# Altium PCB STM32.PcbDoc (part 9 of 10)
Units mil, origin at the board's own origin, x right, y up, seen from the top; angles counter-clockwise.
Board outline 3925 x 3925 mil, 2 copper layers (Top Layer, Bottom Layer); 152 components, 142 nets, 670 pads, 189 vias.
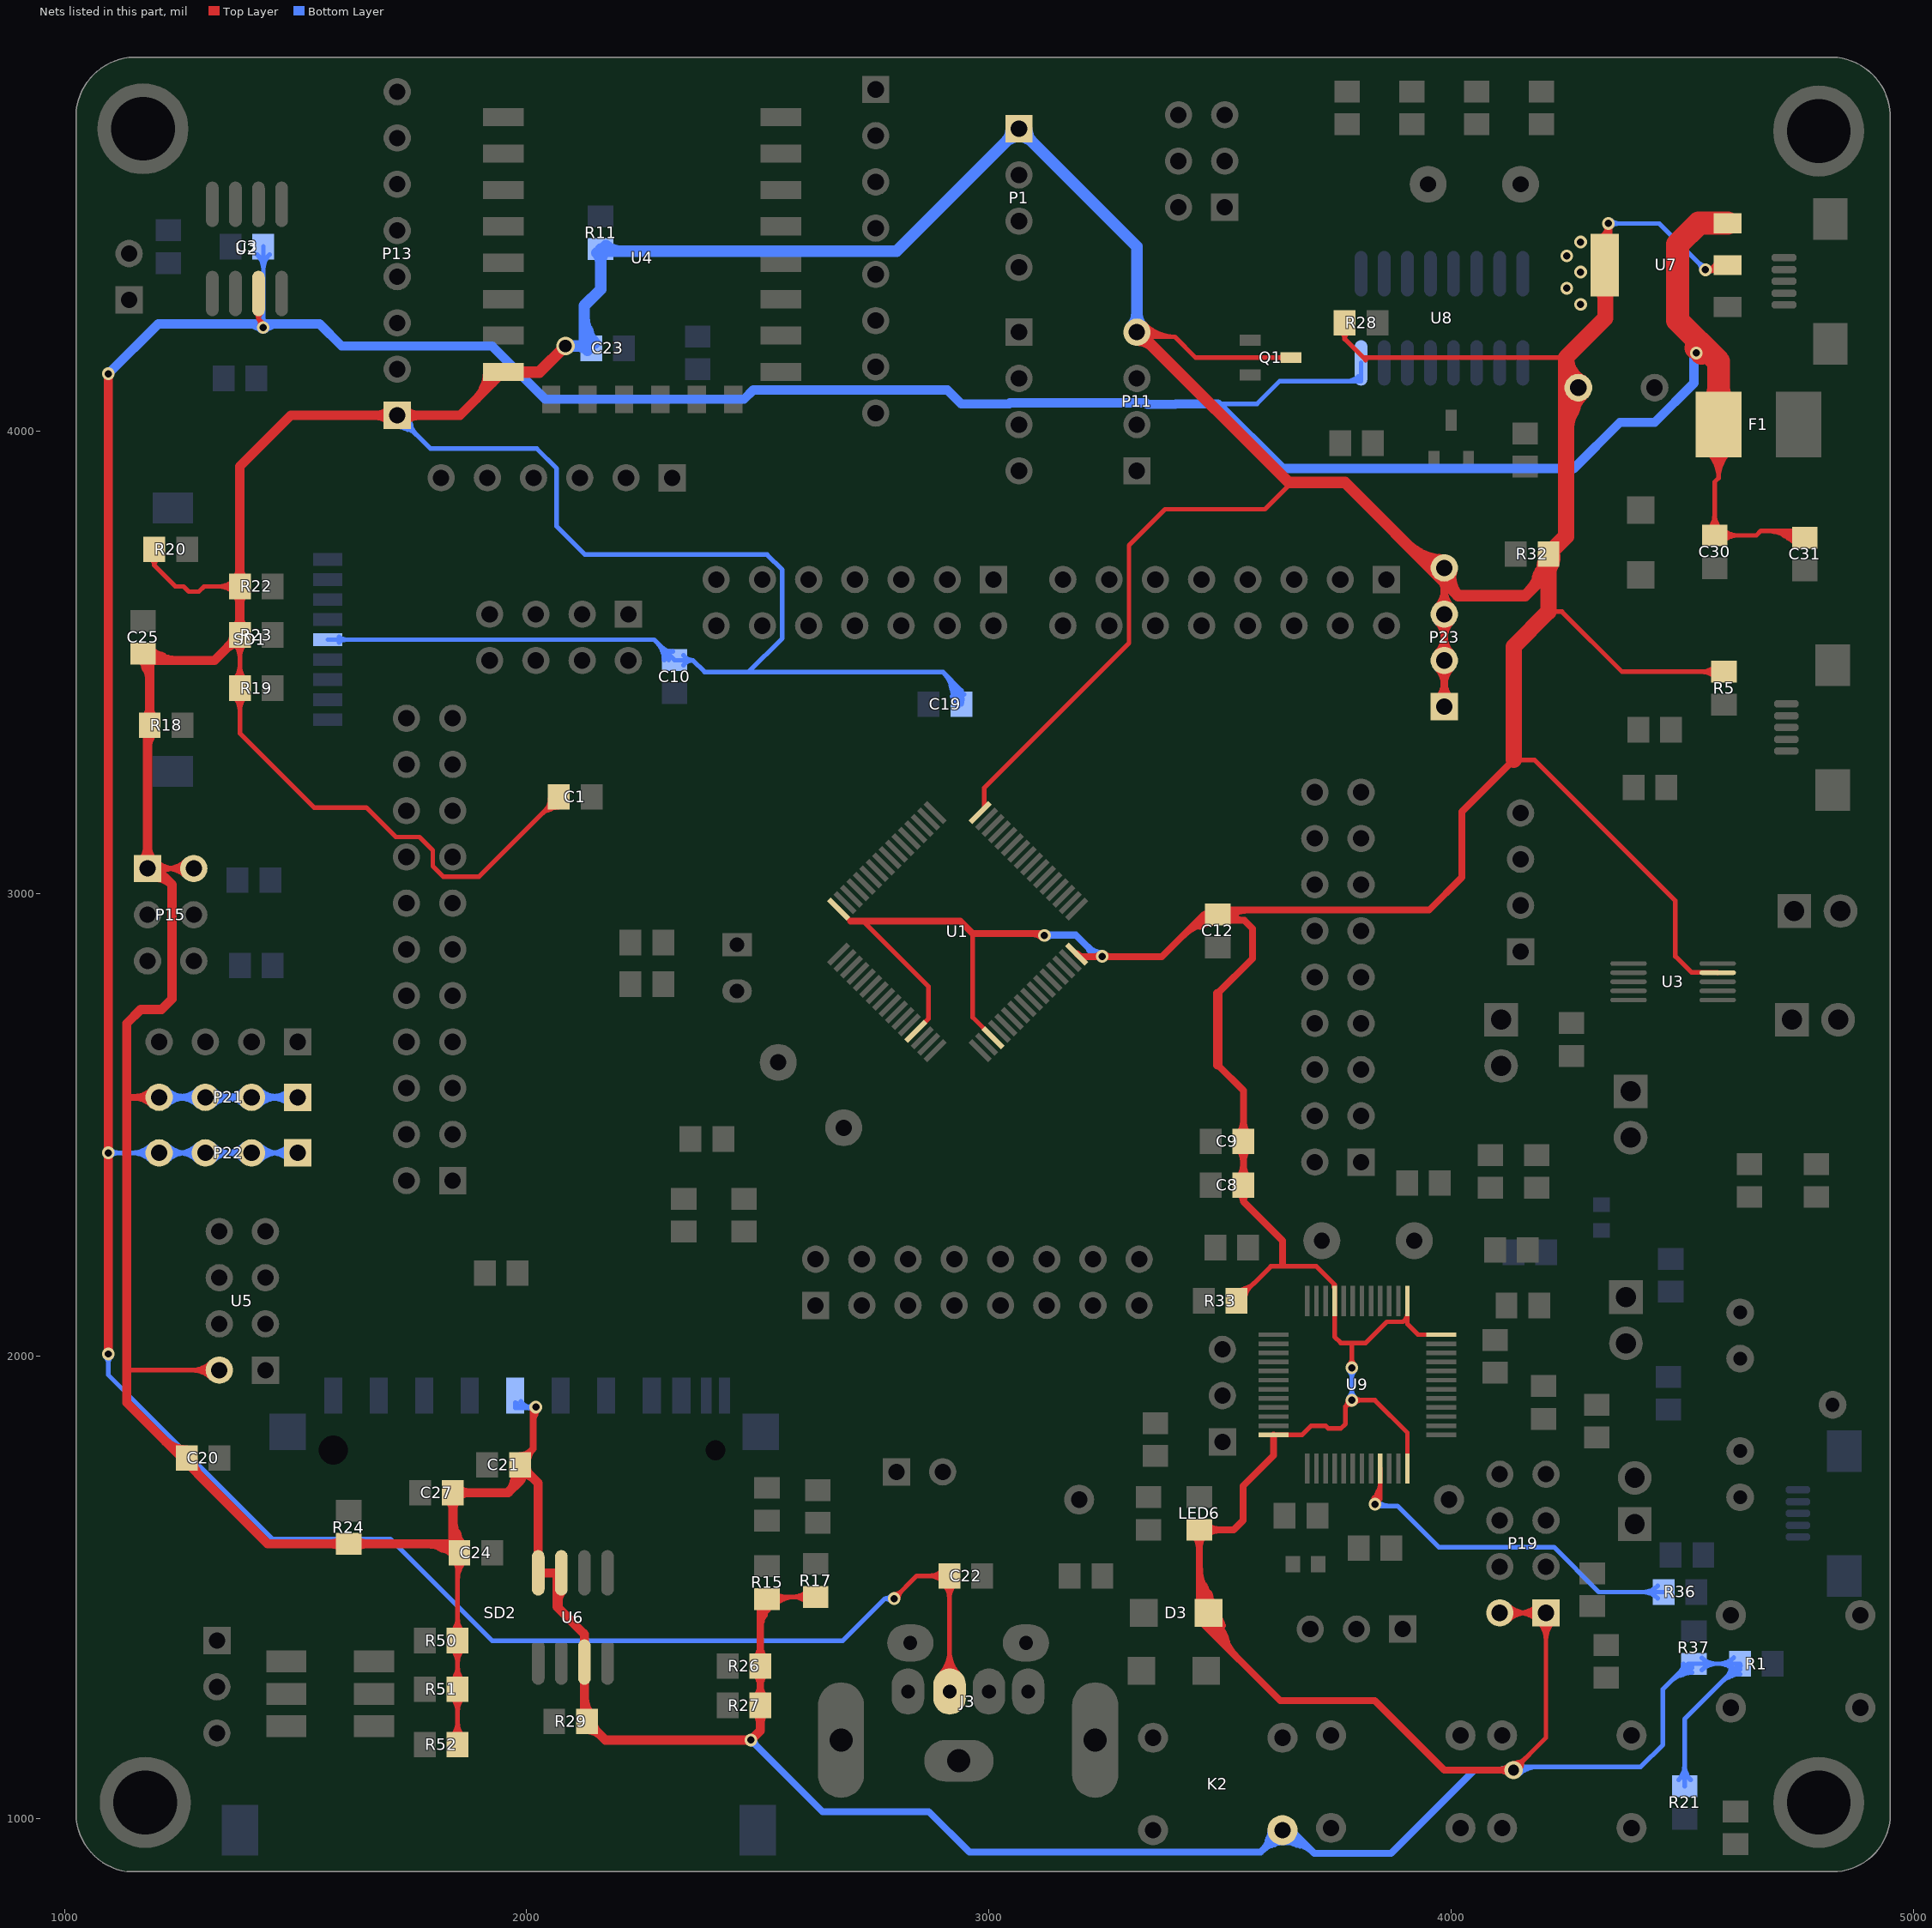
[diagram p9: the nets of this part, all layers, seen from the top]

## Via types
v1: diameter 27.56, hole 15.75, Top Layer to Bottom Layer, tented both sides, 185 vias
v2: diameter 39.37, hole 23.62, Top Layer to Bottom Layer, tented both sides, 3 vias
v3: diameter 39.37, hole 27.56, Top Layer to Bottom Layer, tented both sides, 1 vias

## Nets (pads, with @x,y where several pads share a name; then routed paths per layer and width w, separated by ;. In a path a pad name is that pad's centre, name@x,y a point inside that pad or via, vN(x,y) a via of type N, cw(c..) or ccw(c..) an arc to the next point about the centre after c; other vN are vias at no path point) (continued)
USB_DP: R36.2 U9.33 | length 1227.2
  Top Layer w10: 3833.59,1694.51 ccw(c3846.18,1687.24) v1@3833.98,1679.34 ; v1@3834.4,1688.76 ccw(c3833.46,1702.48) 3845.37,1695.6 ; v1(3835,1680) 3846.24,1691.24 ; 3841.76,1708.67 ccw(c3861.59,1697.22) v1@3842.37,1684.77 ; v1@3843.48,1682.27 cw(c3860.07,1686.72) 3845.2,1695.3 ; U9.33@3846.24,1757.37 3846.24,1691.24 ; 3846.24,1691.24 ccw(c3853.3,1684.17) 3843.56,1681.95 cw(c3853.3,1684.17) 3846.24,1691.24 ; 3846.24,1691.24 cw(c3839.17,1698.3) 3836.95,1688.56 ccw(c3839.17,1698.3) 3846.24,1691.24 ; v1@3828.79,1686.21 ccw(c3786.68,1728.32) 3846.24,1728.32 cw(c3786.68,1728.32) v1@3828.79,1686.21 ; v1@3835.86,1679.14 ccw(c3810.82,1704.18) 3846.24,1704.18 cw(c3810.82,1704.18) v1@3835.86,1679.14
  Bottom Layer w10: v1@3843.74,1676.26 3883.74,1676.26 3972.99,1587.01 4222.4,1587.01 4319.41,1490 R36.2@4459.57,1490 ; 4414.61,1490 ccw(c4414.61,1534.96) 4446.4,1503.17 cw(c4414.61,1534.96) 4414.61,1490 ; 4414.61,1490 cw(c4414.61,1445.04) 4446.4,1476.83 ccw(c4414.61,1445.04) 4414.61,1490 ; v1@3841.21,1686.21 ccw(c3865.22,1710.22) 3865.22,1676.26 cw(c3865.22,1710.22) v1@3841.21,1686.21
VCC: C1.1 C8.2 C9.2 C10.1 C12.1 C19.1 C20.2 C21.1 C23.1 C24.1 C25.1 C27.1 D3.1 K2.1 LED6.1 P1.1 P11.4 P13.1 P15.1 P15.2 P19.1 P19.2 P21.1 P21.2 P21.3 P21.4 P23.1 P23.2 P23.3 P23.4 pad.0@4275,4095 Q1.3 R1.1 R5.1 R11.1 R15.1 R17.1 R18.1 R19.1 R20.1 R21.1 R22.1 R23.1 R24.1 R26.1 R27.1 R28.2 R29.1 R32.1 R33.2 R37.2 R50.1 R51.1 R52.1 SD1.4 SD2.4 U1.13 U1.19 U1.32 U1.48 U1.64 U3.9 U4.15 U5.2 U6.3 U6.7 U6.8 U7.2 U7.4 U9.1 U9.9 U9.24 U9.36 U9.48 | length 49081.6
  Top Layer w10: 1135,1965 1140,1970 U5.2@1335,1970 ; R20.1@1194.57,3745 1194.57,3710.43 ; P15.1@1197.99,3055 P15.2@1280,3055 ; R23.1@1379.57,3560 R19.1@1379.57,3445 1379.57,3347.43 1540,3187 1653,3187 1717,3123 1768,3123 1797,3094 1797,3060 1820,3037 1896.57,3037 C1.1@2069.57,3210 ; R22.1@1379.57,3665 1302.14,3665 1290.88,3653.74 1269.12,3653.74 1257.86,3665 1240,3665 1194.57,3710.43 ; R52.1@1850.43,1160 R51.1@1850.43,1280 R50.1@1850.43,1385 C24.1@1850.43,1570.87 ; 2046.1,3181.15 ccw(c2037,3215.15) C1.1@2070.9,3205.69 ; R15.1@2524.57,1479.57 R17.1@2625,1479.57 ; U1.64@2675,2967.44 2700.92,2941.52 ; 2728.08,2940.92 2869,2800 2869,2729.93 U1.13@2842.03,2702.97 ; 2964.74,2914 2964.74,2733.15 3008.84,2689.05 U1.19@3009.07,2689.05 ; U1.48@2981.23,3176.23 2989.74,3184.74 2989.74,3229.27 3303,3542.53 3303,3754 3381,3832 3597,3832 3647.5,3882.5 ; P11.4@3320,4205 3333.33,4205 3402,4205 ; C12.1@3495,2955.43 C12.1@3507.72,2942.72 ; R33.2@3534.11,2124.31 cw(c3568.01,2114.85) 3558.9,2148.85 ; R33.2@3535.43,2120 3610,2194.57 3708.28,2194.57 3745.61,2157.24 3745.61,2155 ; U9.24@3615.92,1829.91 U9.24@3615.92,1830.21 3677.69,1830.21 3697.18,1849.7 3728.16,1849.7 3734.12,1843.74 3760.88,1843.74 3771.26,1854.12 3771.26,1891.26 ; Q1.3@3653.58,4160 3447,4160 3402,4205 ; 3747.81,2155 U9.9@3747.81,2119.58 3747.81,2042.19 3761.26,2028.74 3785,2028.74 ; R28.2@3769.57,4235 3769.57,4200 ; v1(3785,1975) 3785,2028.74 ; U9.36@3905.29,1757.37 3905.29,1834.71 3835,1905 v1(3785,1905) 3771.26,1891.26 ; U9.1@3905.29,2119.58 3905.29,2084.11 ; U9.48@3978.13,2046.74 3928.26,2046.74 3905.29,2069.71 3905.29,2084.11 ; P23.4@3985,3705 3985,3675 ; P19.2@4105,1445 P19.1@4205,1445 4205,1175 v2(4135,1105) ; 4125,3290 4180,3290 4485,2985 4485,2865 4520,2830 4576.14,2830 U3.9@4576.46,2829.68 ; v2@4129.79,1106.07 cw(c4150.72,1101.78) 4145.19,1122.42 ; v2@4136.07,1099.79 ccw(c4131.78,1120.72) 4152.42,1115.19 ; 4210.43,3610.43 4239.57,3610.43 4369.24,3480.76 R5.1@4589.67,3480.76 ; 4248.39,4160 3815,4160 3815,4154.57 3769.57,4200 ; U7.4@4329.95,4422.82 ccw(c4328.69,4437.56) v1@4343.49,4437.56 ; U7.4@4330.8,4412.86 ccw(c4329.62,4426.67) U7.4@4343.49,4426.67 ; U7.4@4340,4367.87 v1(4340,4450) ; 4343.49,4431.56 ccw(c4366.29,4431.56) U7.4@4350.17,4415.44 ; v1@4556.41,4356 ccw(c4575.15,4373.53) U7.2@4575.15,4347.87 ; v1@4563.26,4347.87 cw(c4569.2,4325.68) U7.2@4580.69,4345.58 ; 4566.06,4347.87 ccw(c4566.06,4333.94) v1@4556.21,4343.79 ; U7.2@4569.74,4349.61 ccw(c4564.93,4367.57) U7.2@4582.67,4361.99 ; U7.2@4587.87,4350 v1(4550,4350) ; 1194.57,3710.43 ccw(c1178.69,3710.43) 1186,3724.53 cw(c1178.69,3710.43) 1194.57,3710.43 ; 1194.57,3710.43 cw(c1210.45,3710.43) 1203.14,3724.53 ccw(c1210.45,3710.43) 1194.57,3710.43 ; 1215.07,3055 ccw(c1215.07,3019.93) 1190.27,3044.73 cw(c1215.07,3019.93) 1215.07,3055 ; 1215.07,3055 cw(c1215.07,3090.07) 1190.27,3065.27 ccw(c1215.07,3090.07) 1215.07,3055 ; 1220.79,3055 ccw(c1220.79,3114.21) 1262.66,3072.34 cw(c1220.79,3114.21) 1220.79,3055 ; 1220.79,3055 cw(c1220.79,2995.78) 1262.66,3037.65 ccw(c1220.79,2995.78) 1220.79,3055 ; 1239.21,3055 ccw(c1239.21,2995.78) 1197.34,3037.65 cw(c1239.21,2995.78) 1239.21,3055 ; 1239.21,3055 cw(c1239.21,3114.21) 1197.34,3072.34 ccw(c1239.21,3114.21) 1239.21,3055 ; 1244.93,3055 ccw(c1244.93,3090.07) 1269.73,3065.27 cw(c1244.93,3090.07) 1244.93,3055 ; 1244.93,3055 cw(c1244.93,3019.93) 1269.73,3044.73 ccw(c1244.93,3019.93) 1244.93,3055 ; 1275.79,1970 ccw(c1275.79,2029.21) 1317.66,1987.34 cw(c1275.79,2029.21) 1275.79,1970 ; 1275.79,1970 cw(c1275.79,1910.79) 1317.66,1952.66 ccw(c1275.79,1910.79) 1275.79,1970 ; 1299.93,1970 ccw(c1299.93,2005.07) 1324.73,1980.27 cw(c1299.93,2005.07) 1299.93,1970 ; 1299.93,1970 cw(c1299.93,1934.93) 1324.73,1959.73 ccw(c1299.93,1934.93) 1299.93,1970 ; 1334.61,3665 ccw(c1334.61,3709.96) 1366.4,3678.17 cw(c1334.61,3709.96) 1334.61,3665 ; 1334.61,3665 cw(c1334.61,3620.04) 1366.4,3651.83 ccw(c1334.61,3620.04) 1334.61,3665 ; 1379.57,3396.11 ccw(c1334.61,3396.11) 1366.4,3427.9 cw(c1334.61,3396.11) 1379.57,3396.11 ; 1379.57,3396.11 cw(c1424.53,3396.11) 1392.74,3427.9 ccw(c1424.53,3396.11) 1379.57,3396.11 ; 1379.57,3493.89 ccw(c1424.53,3493.89) 1392.74,3462.1 cw(c1424.53,3493.89) 1379.57,3493.89 ; 1379.57,3493.89 cw(c1334.61,3493.89) 1366.4,3462.1 ccw(c1334.61,3493.89) 1379.57,3493.89 ; 1379.57,3511.11 ccw(c1334.61,3511.11) 1366.4,3542.9 cw(c1334.61,3511.11) 1379.57,3511.11 ; 1379.57,3511.11 cw(c1424.53,3511.11) 1392.74,3542.9 ccw(c1424.53,3511.11) 1379.57,3511.11 ; 1850.43,1208.89 ccw(c1895.39,1208.89) 1863.6,1177.1 cw(c1895.39,1208.89) 1850.43,1208.89 ; 1850.43,1208.89 cw(c1805.48,1208.89) 1837.27,1177.1 ccw(c1805.48,1208.89) 1850.43,1208.89 ; 1850.43,1231.11 ccw(c1805.48,1231.11) 1837.27,1262.9 cw(c1805.48,1231.11) 1850.43,1231.11 ; 1850.43,1231.11 cw(c1895.39,1231.11) 1863.6,1262.9 ccw(c1895.39,1231.11) 1850.43,1231.11 ; 1850.43,1328.89 ccw(c1895.39,1328.89) 1863.6,1297.1 cw(c1895.39,1328.89) 1850.43,1328.89 ; 1850.43,1328.89 cw(c1805.48,1328.89) 1837.27,1297.1 ccw(c1805.48,1328.89) 1850.43,1328.89 ; 1850.43,1336.11 ccw(c1805.48,1336.11) 1837.27,1367.9 cw(c1805.48,1336.11) 1850.43,1336.11 ; 1850.43,1336.11 cw(c1895.39,1336.11) 1863.6,1367.9 ccw(c1895.39,1336.11) 1850.43,1336.11 ; 1850.43,1433.89 ccw(c1895.39,1433.89) 1863.6,1402.1 cw(c1895.39,1433.89) 1850.43,1433.89 ; 1850.43,1433.89 cw(c1805.48,1433.89) 1837.27,1402.1 ccw(c1805.48,1433.89) 1850.43,1433.89 ; 2576.11,1479.57 ccw(c2576.11,1524.53) 2607.9,1492.74 cw(c2576.11,1524.53) 2576.11,1479.57 ; 2576.11,1479.57 cw(c2576.11,1434.61) 2607.9,1466.4 ccw(c2576.11,1434.61) 2576.11,1479.57 ; 3402,4205 cw(c3402,4295.1) 3337.55,4232.14 ccw(c3402,4295.1) 3402,4205 ; 3626.31,4160 ccw(c3626.31,4176.44) 3637.94,4164.82 cw(c3626.31,4176.44) 3626.31,4160 ; 3626.31,4160 cw(c3626.31,4143.56) 3637.94,4155.18 ccw(c3626.31,4143.56) 3626.31,4160 ; 3745.61,2152.4 ccw(c3753.14,2152.4) U9.9@3747.81,2147.08 ; 3745.61,2152.4 ccw(c3753.14,2152.4) U9.9@3747.81,2147.08 ; 3745.61,2152.4 ccw(c3753.14,2152.4) U9.9@3747.81,2147.08 ; 3745.61,2152.4 ccw(c3753.14,2152.4) U9.9@3747.81,2147.08 ; 3769.57,4200 ccw(c3752.97,4200) 3760.79,4214.64 cw(c3752.97,4200) 3769.57,4200 ; 3769.57,4200 cw(c3786.16,4200) 3778.34,4214.64 ccw(c3786.16,4200) 3769.57,4200 ; 3771.26,1891.26 ccw(c3759.16,1903.36) 3776.24,1904.44 cw(c3759.16,1903.36) 3771.26,1891.26 ; 3771.26,1891.26 cw(c3783.36,1879.16) 3784.44,1896.24 ccw(c3783.36,1879.16) 3771.26,1891.26 ; 3785,1996.2 ccw(c3806.2,1996.2) 3791.21,1981.21 cw(c3806.2,1996.2) 3785,1996.2 ; 3785,1996.2 cw(c3763.8,1996.2) 3778.79,1981.21 ccw(c3763.8,1996.2) 3785,1996.2 ; 3785,2028.74 3815,2028.74 3860.85,2074.6 3895.78,2074.6 3905.29,2084.11 ; 3806.2,1905 ccw(c3806.2,1883.8) 3791.21,1898.79 cw(c3806.2,1883.8) 3806.2,1905 ; 3806.2,1905 cw(c3806.2,1926.2) 3791.21,1911.21 ccw(c3806.2,1926.2) 3806.2,1905 ; 3985,3675 ccw(c3978.92,3675) 3980.13,3680.96 cw(c3978.92,3675) 3985,3675 ; 3985,3675 cw(c3991.08,3675) 3989.87,3680.96 ccw(c3991.08,3675) 3985,3675 ; 4140.07,1445 ccw(c4140.07,1409.93) 4115.27,1434.73 cw(c4140.07,1409.93) 4140.07,1445 ; 4140.07,1445 cw(c4140.07,1480.07) 4115.27,1455.27 ccw(c4140.07,1480.07) 4140.07,1445 ; 4145.79,1445 ccw(c4145.79,1504.21) 4187.66,1462.34 cw(c4145.79,1504.21) 4145.79,1445 ; 4145.79,1445 cw(c4145.79,1385.79) P19.1@4187.66,1427.66 ; 4145.79,1445 cw(c4145.79,1385.79) P19.1@4187.66,1427.66 ; 4160.07,1130.07 ccw(c4185.14,1105) 4149.69,1105 cw(c4185.14,1105) 4160.07,1130.07 ; 4160.07,1130.07 cw(c4135,1155.14) 4135,1119.68 ccw(c4135,1155.14) 4160.07,1130.07 ; 4164.21,1445 ccw(c4164.21,1385.79) 4122.34,1427.66 cw(c4164.21,1385.79) 4164.21,1445 ; 4164.21,1445 cw(c4164.21,1504.21) 4122.34,1462.34 ccw(c4164.21,1504.21) 4164.21,1445 ; 4169.93,1445 ccw(c4169.93,1480.07) 4194.73,1455.27 cw(c4169.93,1480.07) 4169.93,1445 ; 4169.93,1445 cw(c4169.93,1409.93) P19.1@4194.73,1434.73 ; 4169.93,1445 cw(c4169.93,1409.93) P19.1@4194.73,1434.73 ; P19.1@4187.66,1427.66 cw(c4145.79,1385.79) 4205,1385.79 ; P19.1@4187.66,1427.66 cw(c4145.79,1385.79) 4205,1385.79 ; P19.1@4194.73,1434.73 cw(c4169.93,1409.93) 4205,1409.93 ; P19.1@4194.73,1434.73 cw(c4169.93,1409.93) 4205,1409.93 ; 4205,1385.79 cw(c4264.21,1385.79) 4222.34,1427.66 ccw(c4264.21,1385.79) 4205,1385.79 ; 4205,1409.93 cw(c4240.07,1409.93) 4215.27,1434.73 ccw(c4240.07,1409.93) 4205,1409.93 ; v1@4333.27,4444.36 cw(c4324.19,4436.76) 4335.63,4433.69 ; v1@4333.27,4444.36 cw(c4324.19,4436.76) 4335.63,4433.69 ; v1@4333.27,4444.36 cw(c4324.19,4436.76) 4335.63,4433.69 ; v1@4335.61,4442.4 cw(c4329.44,4431.71) 4341.36,4434.9 ; v1@4335.61,4442.4 cw(c4329.44,4431.71) 4341.36,4434.9 ; v1@4335.61,4442.4 cw(c4329.44,4431.71) 4341.36,4434.9 ; 4335.63,4433.69 cw(c4347.07,4430.63) v1@4343.01,4441.75 ; 4335.63,4433.69 cw(c4347.07,4430.63) v1@4343.01,4441.75 ; 4335.63,4433.69 cw(c4347.07,4430.63) v1@4343.01,4441.75 ; 4340,4428.8 ccw(c4318.8,4428.8) 4333.79,4443.79 cw(c4318.8,4428.8) 4340,4428.8 ; 4340,4428.8 cw(c4361.2,4428.8) 4346.21,4443.79 ccw(c4361.2,4428.8) 4340,4428.8 ; v1(4340,4450) cw(c4307.39,4450) 4321.27,4420.49 ccw(c4307.39,4450) v1(4340,4450) ; U7.4@4343.49,4426.97 cw(c4363.26,4432.27) v1@4346.98,4444.68 ; U7.4@4343.49,4426.97 cw(c4363.26,4432.27) v1@4346.98,4444.68 ; U7.4@4343.49,4426.97 cw(c4363.26,4432.27) v1@4346.98,4444.68 ; U7.4@4350.17,4415.44 cw(c4374.71,4439.98) 4340,4439.98 ccw(c4374.71,4439.98) U7.4@4350.17,4415.44 ; v1(4550,4350) ccw(c4550,4375.23) 4573.5,4366.05 cw(c4550,4375.23) v1(4550,4350) ; v1@4556.21,4343.79 cw(c4571.2,4328.8) U7.2@4571.2,4350 ; v1@4556.21,4343.79 cw(c4571.2,4328.8) U7.2@4571.2,4350 ; U7.2@4571.2,4350 cw(c4571.2,4371.2) 4556.21,4356.21 ccw(c4571.2,4371.2) U7.2@4571.2,4350 ; C24.1@1841.4,1557.9 cw(c1819.59,1536.09) 1850.43,1536.09 ccw(c1819.59,1536.09) C24.1@1841.4,1557.9 ; 1850.43,1516.13 cw(c1909.51,1516.13) 1867.74,1557.9 ccw(c1909.51,1516.13) 1850.43,1516.13 ; 1850.43,1540.27 cw(c1885.36,1540.27) 1860.66,1564.97 ccw(c1885.36,1540.27) 1850.43,1540.27 ; 2031.06,3171.49 cw(c2069.57,3132.98) 2069.57,3187.44 ccw(c2069.57,3132.98) 2031.06,3171.49 ; 2040.56,3180.99 ccw(c2015.49,3206.06) 2050.95,3206.06 cw(c2015.49,3206.06) 2040.56,3180.99 ; C1.1@2048.13,3188.56 cw(c2069.57,3167.12) 2069.57,3197.44 ccw(c2069.57,3167.12) C1.1@2048.13,3188.56 ; R15.1@2530.03,1468.9 cw(c2555.78,1443.16) 2555.78,1479.57 ccw(c2555.78,1443.16) R15.1@2530.03,1468.9 ; R15.1@2537.1,1461.83 cw(c2579.92,1419.01) 2579.92,1479.57 ccw(c2579.92,1419.01) R15.1@2537.1,1461.83 ; R15.1@2537.1,1488.17 ccw(c2557.87,1508.93) 2557.87,1479.57 cw(c2557.87,1508.93) R15.1@2537.1,1488.17 ; P11.4@3323.24,4218.16 ccw(c3354.5,4248.7) 3354.5,4205 cw(c3354.5,4248.7) P11.4@3323.24,4218.16 ; P11.4@3330.39,4225.15 ccw(c3378.25,4271.9) 3378.25,4205 cw(c3378.25,4271.9) P11.4@3330.39,4225.15 ; P11.4@3337.34,4197.66 cw(c3355.07,4179.93) 3355.07,4205 ccw(c3355.07,4179.93) P11.4@3337.34,4197.66 ; R33.2@3535.43,2132.56 ccw(c3535.43,2162.88) 3556.87,2141.44 cw(c3535.43,2162.88) R33.2@3535.43,2132.56 ; R33.2@3535.43,2142.56 ccw(c3535.43,2197.02) 3573.94,2158.51 cw(c3535.43,2197.02) R33.2@3535.43,2142.56 ; R33.2@3554.06,2123.94 cw(c3589.51,2123.94) 3564.44,2149.01 ccw(c3589.51,2123.94) R33.2@3554.06,2123.94 ; 3899.66,2078.48 ccw(c3886.06,2092.08) 3905.29,2092.08 cw(c3886.06,2092.08) 3899.66,2078.48 ; U7.4@4325.52,4411.44 ccw(c4314.8,4434.24) 4340,4434.24 cw(c4314.8,4434.24) U7.4@4325.52,4411.44 ; 4540.32,3480.76 cw(c4540.32,3434.68) 4572.9,3467.26 ccw(c4540.32,3434.68) 4540.32,3480.76 ; 4541.9,3480.76 ccw(c4541.9,3524.6) 4572.9,3493.6 cw(c4541.9,3524.6) 4541.9,3480.76 ; 4564.64,4350 ccw(c4564.64,4369.51) 4582.82,4362.42 cw(c4564.64,4369.51) 4564.64,4350
  Top Layer w15: 1135,2560 P21.4@1205,2560 ; C21.1@1985.43,1765 1985.43,1771.43 2014,1800 ; v1@2014,1888 2014,1800 ; v1@2015.43,1885.69 cw(c2007.42,1878.12) 2016.97,1872.61 ; U6.7@2075,1531.46 2070.24,1526.7 2070.24,1457.09 2125,1402.33 2125,1398.79 ; R27.1@2505.43,1245 R26.1@2505.43,1330 2505.43,1460.43 R15.1@2520,1475 R15.1@2524.57,1479.57 ; R15.1@2507,1461.67 cw(c2496.83,1446.71) 2512.49,1437.67 ; R15.1@2515.43,1474.07 cw(c2505.93,1460.1) R15.1@2520.56,1451.65 ; 2700.92,2940.92 2728.08,2940.92 2937.82,2940.92 2964.74,2914 v1@3118,2914 ; 3456.16,2929.96 ccw(c3441.7,2983.93) C12.1@3490.09,2955.99 ; D3.1@3457.77,1459.46 ccw(c3440.38,1474.06) 3460.04,1485.41 ; D3.1@3459.34,1461.15 ccw(c3434.27,1487) 3465.45,1505 ; 3462.86,1480.52 ccw(c3488.48,1495.31) D3.1@3480.82,1466.73 ; D3.1@3469.78,1450.38 ccw(c3448.08,1472.76) 3475.07,1488.34 ; D3.1@3471.25,1438.5 cw(c3425.1,1358.56) 3514.26,1382.45 ; D3.1@3471.54,1438.35 cw(c3454.01,1404.69) 3490.67,1414.51 ; C12.1@3476.27,2961.84 cw(c3449.37,2973.49) 3456.96,2945.17 cw(c3465.64,2912.78) C12.1@3482.81,2941.58 ; D3.1@3478.75,1451.5 cw(c3450.7,1402.91) D3.1@3504.89,1417.43 ; 3491.53,1411.3 cw(c3520.11,1418.96) D3.1@3494.49,1433.75 ; 3495,2630 3550.43,2574.57 C9.2@3550.43,2465 C8.2@3550.43,2370 3550.43,2334.57 ; 3495,2785 3570,2860 3570,2925 3552.28,2942.72 ; C12.1@3507.72,2942.72 3552.28,2942.72 ; C12.1@3512.76,2963.73 ccw(c3526.58,2972.03) 3534.64,2958.06 ; U9.24@3615.92,1829.91 3615.92,1785.49 3550,1719.57 3550,1645 3529.57,1624.57 LED6.1@3455,1624.57 3455,1430 3630,1255 3835,1255 3985,1105 v2(4135,1105) ; 3635,2200 3635,2250 3550.43,2334.57 ; P23.1@3985,3405 P23.2@3985,3505 P23.3@3985,3605 3985,3675 ; 4135,3290 4023,3178 4023,3036 3952,2965 3504.57,2965 C12.1@3495,2955.43 3465.43,2955.43 ; 1151.82,2560 ccw(c1151.82,2613.18) 1189.42,2575.58 cw(c1151.82,2613.18) 1151.82,2560 ; 1151.82,2560 cw(c1151.82,2506.82) 1189.42,2544.42 ccw(c1151.82,2506.82) 1151.82,2560 ; 2014,1800 ccw(c2044.06,1769.93) 2001.55,1769.21 cw(c2044.06,1769.93) 2014,1800 ; 2505.43,1287.14 ccw(c2466.51,1287.14) 2494.03,1314.66 cw(c2466.51,1287.14) 2505.43,1287.14 ; 2505.43,1287.14 cw(c2544.35,1287.14) 2516.83,1314.66 ccw(c2544.35,1287.14) 2505.43,1287.14 ; 2505.43,1287.86 ccw(c2544.35,1287.86) 2516.83,1260.34 cw(c2544.35,1287.86) 2505.43,1287.86 ; 2505.43,1287.86 cw(c2466.51,1287.86) 2494.03,1260.34 ccw(c2466.51,1287.86) 2505.43,1287.86 ; 2505.43,1372.86 ccw(c2544.35,1372.86) 2516.83,1345.34 cw(c2544.35,1372.86) 2505.43,1372.86 ; 2505.43,1372.86 cw(c2466.51,1372.86) 2494.03,1345.34 ccw(c2466.51,1372.86) 2505.43,1372.86 ; U1.32@3197.85,2864 3190.94,2870.92 U1.32@3197.85,2864 ; U1.32@3197.85,2864 3374,2864 3465.43,2955.43 ; 3455,1585.65 ccw(c3416.08,1585.65) 3443.6,1613.17 cw(c3416.08,1585.65) 3455,1585.65 ; 3455,1585.65 cw(c3493.92,1585.65) 3466.4,1613.17 ccw(c3493.92,1585.65) 3455,1585.65 ; 3465.43,2955.43 ccw(c3465.43,2967.75) 3476.53,2962.41 cw(c3465.43,2967.75) 3465.43,2955.43 ; 3465.43,2955.43 cw(c3465.43,2943.12) 3476.53,2948.45 ccw(c3465.43,2943.12) 3465.43,2955.43 ; 3497.85,1624.57 ccw(c3497.85,1585.65) 3470.34,1613.17 cw(c3497.85,1585.65) 3497.85,1624.57 ; 3497.86,1624.57 cw(c3497.86,1663.49) 3470.34,1635.97 ccw(c3497.86,1663.49) 3497.86,1624.57 ; 3550.43,2334.57 ccw(c3527.73,2334.57) 3541.01,2352.99 cw(c3527.73,2334.57) 3550.43,2334.57 ; 3550.43,2334.57 cw(c3573.14,2334.57) 3559.86,2352.99 ccw(c3573.14,2334.57) 3550.43,2334.57 ; 3550.43,2412.86 ccw(c3589.36,2412.86) 3561.83,2385.34 cw(c3589.36,2412.86) 3550.43,2412.86 ; 3550.43,2412.86 cw(c3511.51,2412.86) 3539.03,2385.34 ccw(c3511.51,2412.86) 3550.43,2412.86 ; 3550.43,2422.14 ccw(c3511.51,2422.14) 3539.03,2449.67 cw(c3511.51,2422.14) 3550.43,2422.14 ; 3550.43,2422.14 cw(c3589.36,2422.14) 3561.83,2449.67 ccw(c3589.36,2422.14) 3550.43,2422.14 ; 3550.43,2507.86 ccw(c3589.36,2507.86) 3561.83,2480.34 cw(c3589.36,2507.86) 3550.43,2507.86 ; 3550.43,2507.86 cw(c3511.51,2507.86) 3539.03,2480.34 ccw(c3511.51,2507.86) 3550.43,2507.86 ; 3552.28,2942.72 cw(c3552.28,2990.35) 3512.43,2964.26 ccw(c3552.28,2990.35) 3552.28,2942.72 ; 3985,3451.82 ccw(c3931.82,3451.82) 3969.42,3489.42 cw(c3931.82,3451.82) 3985,3451.82 ; 3985,3451.82 cw(c4038.18,3451.82) 4000.58,3489.42 ccw(c4038.18,3451.82) 3985,3451.82 ; 3985,3458.18 ccw(c4038.18,3458.18) 4000.58,3420.58 cw(c4038.18,3458.18) 3985,3458.18 ; 3985,3458.18 cw(c3931.82,3458.18) 3969.42,3420.58 ccw(c3931.82,3458.18) 3985,3458.18 ; 3985,3551.82 ccw(c3931.82,3551.82) 3969.42,3589.42 cw(c3931.82,3551.82) 3985,3551.82 ; 3985,3551.82 cw(c4038.18,3551.82) 4000.58,3589.42 ccw(c4038.18,3551.82) 3985,3551.82 ; 3985,3558.18 ccw(c4038.18,3558.18) 4000.58,3520.58 cw(c4038.18,3558.18) 3985,3558.18 ; 3985,3558.18 cw(c3931.82,3558.18) 3969.42,3520.58 ccw(c3931.82,3558.18) 3985,3558.18 ; 3985,3651.82 ccw(c3931.82,3651.82) 3969.42,3689.42 cw(c3931.82,3651.82) 3985,3651.82 ; 3985,3651.82 cw(c4038.18,3651.82) 4000.58,3689.42 ccw(c4038.18,3651.82) 3985,3651.82 ; 3985,3658.18 ccw(c4038.18,3658.18) 4000.58,3620.58 cw(c4038.18,3658.18) 3985,3658.18 ; 3985,3658.18 cw(c3931.82,3658.18) 3969.42,3620.58 ccw(c3931.82,3658.18) 3985,3658.18 ; 3985,3675 ccw(c3975.59,3675) 3978.4,3683.98 cw(c3975.59,3675) 3985,3675 ; 3985,3675 cw(c3994.41,3675) 3991.6,3683.98 ccw(c3994.41,3675) 3985,3675 ; 4105.58,1105 ccw(c4105.58,1134.42) 4126.38,1113.62 cw(c4105.58,1134.42) 4105.58,1105 ; 4105.58,1105 cw(c4105.58,1075.58) 4126.38,1096.38 ccw(c4105.58,1075.58) 4105.58,1105 ; C21.1@1985.43,1785.06 ccw(c1985.43,1817.96) 2008.69,1794.69 cw(c1985.43,1817.96) C21.1@1985.43,1785.06 ; 2014,1860.35 cw(c2049.65,1860.35) 2024.44,1885.56 ccw(c2049.65,1860.35) 2014,1860.35 ; 2070.24,1469.38 cw(c2101.64,1469.38) 2079.44,1491.58 ccw(c2101.64,1469.38) 2070.24,1469.38 ; 2505.43,1410.41 cw(c2580.65,1410.41) 2527.46,1463.6 ccw(c2580.65,1410.41) 2505.43,1410.41 ; 2505.43,1446.63 cw(c2544.44,1446.63) 2516.86,1474.21 ccw(c2544.44,1446.63) 2505.43,1446.63 ; 3095.18,2914 cw(c3095.18,2885.18) 3115.56,2905.56 ccw(c3095.18,2885.18) 3095.18,2914 ; 3227.43,2864 ccw(c3227.43,2882.57) 3240.56,2869.44 cw(c3227.43,2882.57) 3227.43,2864 ; v1@3249.44,2869.44 ccw(c3262.57,2882.57) 3262.57,2864 cw(c3262.57,2882.57) v1@3249.44,2869.44 ; 3419.78,2909.78 cw(c3491.07,2838.5) 3491.07,2939.31 ccw(c3491.07,2838.5) 3419.78,2909.78 ; 3445.39,2935.39 cw(c3491.07,2889.72) 3491.07,2954.31 ccw(c3491.07,2889.72) 3445.39,2935.39 ; 3455,1475.18 ccw(c3505.18,1475.18) 3469.7,1439.7 cw(c3505.18,1475.18) 3455,1475.18 ; 3455,1511.39 ccw(c3541.39,1511.39) 3480.3,1450.3 cw(c3541.39,1511.39) 3455,1511.39 ; 3455,1547.6 ccw(c3577.6,1547.6) 3490.91,1460.91 cw(c3577.6,1547.6) 3455,1547.6 ; D3.1@3467.5,1445 ccw(c3533.89,1445) 3486.95,1398.05 cw(c3533.89,1445) D3.1@3467.5,1445 ; D3.1@3482.5,1445 ccw(c3585.1,1445) 3512.55,1372.45 cw(c3585.1,1445) D3.1@3482.5,1445 ; D3.1@3497.5,1445 ccw(c3636.32,1445) 3538.16,1346.84 cw(c3636.32,1445) D3.1@3497.5,1445 ; C12.1@3499.73,2954.64 cw(c3524.75,2929.62) 3524.75,2965 ccw(c3524.75,2929.62) C12.1@3499.73,2954.64 ; C12.1@3499.88,2956.05 ccw(c3524.53,2972.19) 3524.53,2942.72 cw(c3524.53,2972.19) C12.1@3499.88,2956.05 ; C12.1@3510.34,2944.03 cw(c3560.96,2893.41) 3560.96,2965 ccw(c3560.96,2893.41) C12.1@3510.34,2944.03
  Top Layer w20: 1178.41,3485.5 cw(c1194.5,3494.79) C25.1@1182.64,3509.09 ; C25.1@1182.58,3509.04 cw(c1200.17,3487.6) 1214.03,3511.61 ; 1812.85,1587.83 ccw(c1828.1,1614.25) C24.1@1846.4,1589.84 ; C24.1@1844.2,1587.77 ccw(c1823.93,1605.05) 1847,1618.37 ; 1904.22,4086.84 cw(c1957.66,4072.52) U4.15@1930,4120.43 ; U4.15@1949.76,4128.82 1855.95,4035 P13.1@1720,4035 1490,4035 1379.57,3924.57 R22.1@1379.57,3665 R23.1@1379.57,3560 1324.57,3505 1184.57,3505 R18.1@1184.57,3365 1180,3360.43 P15.1@1180,3055 1197.99,3055 1232.99,3020 ; R27.1@2505.43,1245 2505.43,1190.43 v1(2485,1170) 2170.43,1170 R29.1@2130.43,1210 2125,1215.43 U6.3@2125,1338.54 2125,1398.79 2065.48,1458.31 2065.48,1531.46 U6.8@2025,1531.46 2025,1725.43 C21.1@1985.43,1765 1985.43,1730.43 ; 3495,2630 3495,2785 ; 1180,3102.14 ccw(c1227.14,3102.14) 1193.81,3068.81 cw(c1227.14,3102.14) 1180,3102.14 ; 1180,3102.14 cw(c1132.86,3102.14) 1166.19,3068.81 ccw(c1132.86,3102.14) 1180,3102.14 ; 1184.57,3401.82 ccw(c1217.45,3401.82) 1194.2,3378.57 cw(c1217.45,3401.82) 1184.57,3401.82 ; 1184.57,3401.82 cw(c1151.68,3401.82) 1174.94,3378.57 ccw(c1151.68,3401.82) 1184.57,3401.82 ; 1232.99,3020 ccw(c1192.96,2979.97) 1183.32,3035.76 cw(c1192.96,2979.97) 1232.99,3020 ; 1232.99,3020 1232.99,2772.99 1210,2750 1165,2750 1135,2720 1135,2560 1135,1965 1135,1899.57 1440,1594.57 R24.1@1615,1594.57 1835,1594.57 1840.43,1600 C27.1@1840.43,1705 1960,1705 ; 1379.57,3596.82 ccw(c1412.45,3596.82) 1389.2,3573.57 cw(c1412.45,3596.82) 1379.57,3596.82 ; 1379.57,3596.82 cw(c1346.68,3596.82) 1369.94,3573.57 ccw(c1346.68,3596.82) 1379.57,3596.82 ; 1379.57,3628.18 ccw(c1346.68,3628.18) 1369.94,3651.43 cw(c1346.68,3628.18) 1379.57,3628.18 ; 1379.57,3628.18 cw(c1412.45,3628.18) 1389.2,3651.43 ccw(c1412.45,3628.18) 1379.57,3628.18 ; 1379.57,3701.82 ccw(c1412.45,3701.82) 1389.2,3678.57 cw(c1412.45,3701.82) 1379.57,3701.82 ; 1379.57,3701.82 cw(c1346.68,3701.82) 1369.94,3678.57 ccw(c1346.68,3701.82) 1379.57,3701.82 ; 1578.18,1594.57 ccw(c1578.18,1627.45) 1601.43,1604.2 cw(c1578.18,1627.45) 1578.18,1594.57 ; 1578.18,1594.57 cw(c1578.18,1561.68) 1601.43,1584.94 ccw(c1578.18,1561.68) 1578.18,1594.57 ; 1651.82,1594.57 ccw(c1651.82,1561.68) 1628.57,1584.94 cw(c1651.82,1561.68) 1651.82,1594.57 ; 1651.82,1594.57 cw(c1651.82,1627.45) 1628.57,1604.2 ccw(c1651.82,1627.45) 1651.82,1594.57 ; 1672.86,4035 ccw(c1672.86,4082.14) 1706.19,4048.81 cw(c1672.86,4082.14) 1672.86,4035 ; 1672.86,4035 cw(c1672.86,3987.86) 1706.19,4021.19 ccw(c1672.86,3987.86) 1672.86,4035 ; 1767.14,4035 ccw(c1767.14,3987.86) 1733.81,4021.19 cw(c1767.14,3987.86) 1767.14,4035 ; 1767.14,4035 cw(c1767.14,4082.14) 1733.81,4048.81 ccw(c1767.14,4082.14) 1767.14,4035 ; 1840.43,1668.18 ccw(c1807.55,1668.18) 1830.8,1691.43 cw(c1807.55,1668.18) 1840.43,1668.18 ; 1840.43,1668.18 cw(c1873.32,1668.18) 1850.06,1691.43 ccw(c1873.32,1668.18) 1840.43,1668.18 ; 1873.32,1705 ccw(c1873.32,1672.11) 1850.06,1695.37 cw(c1873.32,1672.11) 1873.32,1705 ; 1873.32,1705 cw(c1873.32,1737.89) 1850.06,1714.63 ccw(c1873.32,1737.89) 1873.32,1705 ; 1960,1705 ccw(c1923.89,1741.12) 1972.47,1756.86 cw(c1923.89,1741.12) 1960,1705 ; 1960,1705 1985.43,1730.43 ; 1985.43,1730.43 ccw(c1957.81,1730.43) 1976.31,1750.95 cw(c1957.81,1730.43) 1985.43,1730.43 ; 1985.43,1730.43 cw(c2013.06,1730.43) 1994.56,1750.95 ccw(c2013.06,1730.43) 1985.43,1730.43 ; 2505.43,1208.18 ccw(c2472.55,1208.18) 2495.8,1231.43 cw(c2472.55,1208.18) 2505.43,1208.18 ; 2505.43,1208.18 cw(c2538.32,1208.18) 2515.06,1231.43 ccw(c2538.32,1208.18) 2505.43,1208.18 ; C25.1@1164.3,3509.94 cw(c1115.39,3461.02) 1184.57,3461.02 ccw(c1115.39,3461.02) C25.1@1164.3,3509.94 ; C25.1@1169.43,3515.06 ccw(c1193.71,3539.34) 1193.71,3505 cw(c1193.71,3539.34) C25.1@1169.43,3515.06 ; 1180,3317.15 cw(c1228.48,3317.15) 1194.2,3351.43 ccw(c1228.48,3317.15) 1180,3317.15 ; C25.1@1183.57,3529.2 ccw(c1241.99,3587.62) 1241.99,3505 cw(c1241.99,3587.62) C25.1@1183.57,3529.2 ; 1217.52,1817.05 ccw(c1264.57,1864.09) 1264.57,1797.56 cw(c1264.57,1864.09) 1217.52,1817.05 ; C20.2@1278.19,1776.06 ccw(c1325.71,1776.06) 1292.11,1742.46 cw(c1325.71,1776.06) C20.2@1278.19,1776.06 ; 1349.59,3530.02 cw(c1379.57,3500.05) 1379.57,3542.44 ccw(c1379.57,3500.05) 1349.59,3530.02 ; R23.1@1359.1,3539.53 ccw(c1342.56,3556.06) 1365.95,3556.06 cw(c1342.56,3556.06) R23.1@1359.1,3539.53 ; 1783.94,1594.57 cw(c1783.94,1508.31) 1844.94,1569.3 ccw(c1783.94,1508.31) 1783.94,1594.57 ; C24.1@1832.23,1594.57 cw(c1832.23,1556.6) 1859.08,1583.45 ccw(c1832.23,1556.6) C24.1@1832.23,1594.57 ; 1840.43,1645.95 ccw(c1921.58,1645.95) 1864.2,1588.57 cw(c1921.58,1645.95) 1840.43,1645.95 ; 1891.23,4070.28 ccw(c1832.69,4128.82) 1915.47,4128.82 cw(c1832.69,4128.82) 1891.23,4070.28 ; 1925.37,4104.42 ccw(c1900.97,4128.82) 1935.47,4128.82 cw(c1900.97,4128.82) 1925.37,4104.42 ; 1983.1,1728.1 ccw(c1958.77,1752.42) 1991.5,1763.03 cw(c1958.77,1752.42) 1983.1,1728.1 ; C21.1@1985.43,1747.44 cw(c1985.43,1705.05) 2015.41,1735.02 ccw(c1985.43,1705.05) C21.1@1985.43,1747.44 ; C21.1@1999.05,1761.06 ccw(c2022.44,1761.06) 2005.9,1744.53 cw(c2022.44,1761.06) C21.1@1999.05,1761.06 ; 2065.48,1463.92 cw(c2107.1,1463.92) 2077.67,1493.35 ccw(c2107.1,1463.92) 2065.48,1463.92 ; 2125,1259.94 ccw(c2176.44,1259.94) 2140.06,1223.57 cw(c2176.44,1259.94) 2125,1259.94 ; R29.1@2130.43,1192.44 cw(c2130.43,1150.05) 2160.41,1180.02 ccw(c2130.43,1150.05) R29.1@2130.43,1192.44 ; R29.1@2144.05,1206.06 ccw(c2167.44,1206.06) 2150.9,1189.53 cw(c2167.44,1206.06) R29.1@2144.05,1206.06
  Top Layer w25: U4.15@1949.76,4128.82 2027.82,4128.82 v3(2084,4185) ; P11.4@3320,4215 3323.33,4215 3333.33,4205 3648.33,3890 3770,3890 3985,3675 4015,3645 ; 4186.39,3682.86 cw(c4247.76,3666.41) R32.1@4215.99,3721.43 ; 4210.43,3695.43 4160,3645 4015,3645 ; R5.1@4589.67,3480.76 R5.1@4590,3480.43 ; 4015,3645 cw(c4053.92,3683.92) 4001.28,3700.02 ccw(c4053.92,3683.92) 4015,3645 ; P11.4@3320,4197.97 cw(c3320,4148.83) 3354.75,4183.58 ccw(c3320,4148.83) P11.4@3320,4197.97 ; P11.4@3337.03,4215 ccw(c3370.1,4215) 3346.71,4191.61 cw(c3370.1,4215) P11.4@3337.03,4215 ; 3904.72,3755.28 ccw(c3985,3835.56) 3985,3722.03 cw(c3985,3835.56) 3904.72,3755.28 ; 3947.4,3712.6 ccw(c3985,3750.21) 3985,3697.03 cw(c3985,3750.21) 3947.4,3712.6 ; P23.4@3977.38,3707.33 ccw(c4008.86,3697.7) 3985.58,3674.42 cw(c4008.86,3697.7) P23.4@3977.38,3707.33 ; 4166.25,3651.25 ccw(c4086.44,3731.06) 4199.31,3731.06 cw(c4086.44,3731.06) 4166.25,3651.25 ; 4208.93,3693.93 ccw(c4171.79,3731.06) 4224.31,3731.06 cw(c4171.79,3731.06) 4208.93,3693.93
  Top Layer w35: 4135,3290 4135,3535 4210.43,3610.43 4210.43,3695.43 R32.1@4210.43,3735 4248.39,3772.95 4248.39,4160 ; 4256,4037.94 ccw(c4195.01,4073.15) pad.0@4262.94,4091.71 ; 4257.07,4128.17 cw(c4239.53,4109.31) pad.0@4263.41,4099.68 ; U7.4@4333.39,4358.74 4333.39,4245 4248.39,4160 ; 4248.39,4160 ccw(c4309.45,4160) 4280.85,4106.04 cw(c4309.45,4160) 4248.39,4160 ; 4248.39,4000.57 cw(c4369.43,4000.57) 4283.84,4086.16 ccw(c4369.43,4000.57) 4248.39,4000.57 ; U7.4@4322.93,4313.4 cw(c4297.67,4288.14) 4333.39,4288.14 ccw(c4297.67,4288.14) U7.4@4322.93,4313.4
  Bottom Layer w10: SD1.4@1570,3550 2275.43,3550 C10.1@2320,3505.43 2359.57,3505.43 ; P13.1@1714.64,4033.9 ccw(c1752.3,4041.61) 1742.35,4004.48 ; P13.1@1720,4035 1792,3963 2022,3963 2065,3920 2065,3795 2126,3734 2520,3734 2553,3701 2553,3553 2480,3480 ; P13.1@1721.1,4040.36 cw(c1713.39,4002.7) 1750.52,4012.65 ; SD2.4@1975.28,1900 1975.28,1888 v1@2014,1888 ; 2281.49,3543.94 cw(c2242.98,3505.43) C10.1@2297.44,3505.43 ; 2290.99,3534.44 ccw(c2316.06,3559.51) C10.1@2316.06,3524.05 ; C10.1@2298.56,3526.87 cw(c2277.12,3505.43) C10.1@2307.44,3505.43 ; C10.1@2339.22,3494.8 cw(c2359.57,3480.65) 2359.57,3505.43 ; C10.1@2339.22,3516.06 ccw(c2359.57,3530.21) 2359.57,3505.43 ; 2917.42,3451.38 ccw(c2975.02,3458.88) C19.1@2939.59,3412.85 ; C19.1@2920.53,3427.44 ccw(c2954.19,3431.82) C19.1@2933.49,3404.92 ; C19.1@2925.67,3425.3 ccw(c2912.58,3435.37) C19.1@2928.96,3437.51 ; C19.1@2940.43,3410 2940.43,3440 ; v1@3118,2914 v1@3121,2911 ; v1(3785,1905) v1(3785,1975) ; v2@4135,1112 4410,1112 4458,1160 4458,1280 4513,1335 R1.1@4624.57,1335 4505,1215.43 R21.1@4505,1070 ; v1(4340,4450) 4450,4450 v1(4550,4350) ; 4495.1,1308.99 ccw(c4484.77,1347.55) R37.2@4522.36,1334.1 ; 4601.1,1306.15 ccw(c4592,1340.15) R1.1@4625.9,1330.69 ; 1608.91,3550 ccw(c1608.91,3528.8) 1593.92,3543.79 cw(c1608.91,3528.8) 1608.91,3550 ; 1608.91,3550 cw(c1608.91,3571.2) 1593.92,3556.21 ccw(c1608.91,3571.2) 1608.91,3550 ; P13.1@1744.8,4010.2 ccw(c1720,3985.4) 1720,4020.47 cw(c1720,3985.4) P13.1@1744.8,4010.2 ; P13.1@1744.8,4010.2 cw(c1769.6,4035) 1734.53,4035 ccw(c1769.6,4035) P13.1@1744.8,4010.2 ; 1761.87,3993.13 ccw(c1720,3951.26) 1720,4010.47 cw(c1720,3951.26) 1761.87,3993.13 ; 1761.87,3993.13 cw(c1803.74,4035) 1744.53,4035 ccw(c1803.74,4035) 1761.87,3993.13 ; 2004.63,1890.51 ccw(c2006.31,1896.78) v1@2012.13,1893.9 ; 2004.63,1890.51 ccw(c2006.31,1896.78) v1@2012.13,1893.9 ; 2004.63,1890.51 ccw(c2006.31,1896.78) v1@2012.13,1893.9 ; v1@2014,1888 cw(c2014,1918.39) 1987.89,1902.83 ccw(c2014,1918.39) v1@2014,1888 ; 2359.57,3505.43 2385,3480 2480,3480 ; 2480,3480 2900.43,3480 ; 2900.43,3480 cw(c2846.83,3426.4) 2921.97,3416.4 ccw(c2846.83,3426.4) 2900.43,3480 ; 2900.43,3480 2940.43,3440 ; 2940.43,3440 ccw(c2949.36,3440) 2946.46,3431.56 cw(c2949.36,3440) 2940.43,3440 ; 2940.43,3440 cw(c2931.51,3440) 2934.4,3431.56 ccw(c2931.51,3440) 2940.43,3440 ; 3785,1926.2 ccw(c3806.2,1926.2) 3791.21,1911.21 cw(c3806.2,1926.2) 3785,1926.2 ; 3785,1926.2 cw(c3763.8,1926.2) 3778.79,1911.21 ccw(c3763.8,1926.2) 3785,1926.2 ; 3785,1953.8 ccw(c3763.8,1953.8) 3778.79,1968.79 cw(c3763.8,1953.8) 3785,1953.8 ; 3785,1953.8 cw(c3806.2,1953.8) 3791.21,1968.79 ccw(c3806.2,1953.8) 3785,1953.8 ; 4361.2,4450 ccw(c4361.2,4428.8) 4346.21,4443.79 cw(c4361.2,4428.8) 4361.2,4450 ; 4361.2,4450 cw(c4361.2,4471.2) 4346.21,4456.21 ccw(c4361.2,4471.2) 4361.2,4450 ; 4505,1115.39 ccw(c4549.96,1115.39) 4518.17,1083.6 cw(c4549.96,1115.39) 4505,1115.39 ; 4505,1115.39 cw(c4460.04,1115.39) 4491.83,1083.6 ccw(c4460.04,1115.39) 4505,1115.39 ; 4535.01,4364.99 ccw(c4550,4379.98) 4550,4358.78 cw(c4550,4379.98) 4535.01,4364.99 ; 4535.01,4364.99 cw(c4520.02,4350) 4541.22,4350 ccw(c4520.02,4350) 4535.01,4364.99 ; 4579.61,1335 ccw(c4579.61,1379.96) 4611.4,1348.17 cw(c4579.61,1379.96) 4579.61,1335 ; 4579.61,1335 cw(c4579.61,1290.04) 4611.4,1321.83 ccw(c4579.61,1290.04) 4579.61,1335 ; SD2.4@1979.3,1897.71 ccw(c1996.4,1907.9) 1996.4,1888 cw(c1996.4,1907.9) SD2.4@1979.3,1897.71 ; SD2.4@1993.98,1888 ccw(c1993.98,1916.02) 2013.79,1896.21 cw(c1993.98,1916.02) SD2.4@1993.98,1888 ; 2003.63,1888 cw(c2003.63,1873.63) 2013.79,1883.79 ccw(c2003.63,1873.63) 2003.63,1888 ; 2914.75,3465.69 cw(c2872.09,3423.03) 2931.89,3415.08 ccw(c2872.09,3423.03) 2914.75,3465.69 ; 2929.06,3451.37 cw(c2897.36,3419.67) 2941.8,3413.76 ccw(c2897.36,3419.67) 2929.06,3451.37 ; v2@4138.31,1101.69 cw(c4163.21,1076.79) 4163.21,1112 ccw(c4163.21,1076.79) v2@4138.31,1101.69 ; v2@4145.38,1094.62 cw(c4187.35,1052.65) 4187.35,1112 ccw(c4187.35,1052.65) v2@4145.38,1094.62 ; v2@4145.38,1115.38 ccw(c4153.55,1123.55) 4153.55,1112 cw(c4153.55,1123.55) v2@4145.38,1115.38 ; 4474.77,1296.77 cw(c4521.06,1250.47) 4521.06,1315.94 ccw(c4521.06,1250.47) 4474.77,1296.77 ; 4491.84,1313.84 cw(c4521.06,1284.62) 4521.06,1325.94 ccw(c4521.06,1284.62) 4491.84,1313.84 ; 4495.28,1317.28 ccw(c4478,1334.57) 4502.44,1334.57 cw(c4478,1334.57) 4495.28,1317.28 ; R37.2@4542.1,1321.4 cw(c4574.94,1288.57) 4574.94,1335 ccw(c4574.94,1288.57) R37.2@4542.1,1321.4 ; R37.2@4542.1,1347.73 ccw(c4572.85,1378.48) 4572.85,1335 cw(c4572.85,1378.48) R37.2@4542.1,1347.73 ; 4586.06,1296.49 cw(c4624.57,1257.98) 4624.57,1312.44 ccw(c4624.57,1257.98) 4586.06,1296.49 ; 4595.56,1305.99 ccw(c4570.49,1331.06) 4605.95,1331.06 cw(c4570.49,1331.06) 4595.56,1305.99 ; R1.1@4603.13,1313.56 cw(c4624.57,1292.12) 4624.57,1322.44 ccw(c4624.57,1292.12) R1.1@4603.13,1313.56
  Bottom Layer w15: P21.4@1205,2560 P21.3@1305,2560 P21.2@1405,2560 P21.1@1505,2560 ; v1(2485,1170) 2640,1015 2870,1015 2957.51,927.49 3587.49,927.49 K2.1@3635,975 3654,975 3704,925 ; v1@3121,2911 3188,2911 v1@3235,2864 ; 3217.78,2878.57 cw(c3208.5,2843.93) v1@3239.56,2861.86 ; 3603.61,951.24 cw(c3641.97,940.96) K2.1@3634,979.87 ; 3611.24,943.61 ccw(c3600.96,981.97) K2.1@3639.87,974 ; K2.1@3630.77,972.39 ccw(c3685.36,1005.98) 3673.27,943.04 ; v2(4135,1105) 4050,1105 3870,925 3704,925 ; 1251.82,2560 ccw(c1251.82,2613.18) 1289.42,2575.58 cw(c1251.82,2613.18) 1251.82,2560 ; 1251.82,2560 cw(c1251.82,2506.82) 1289.42,2544.42 ccw(c1251.82,2506.82) 1251.82,2560 ; 1258.18,2560 ccw(c1258.18,2506.82) 1220.58,2544.42 cw(c1258.18,2506.82) 1258.18,2560 ; 1258.18,2560 cw(c1258.18,2613.18) 1220.58,2575.58 ccw(c1258.18,2613.18) 1258.18,2560 ; 1351.82,2560 ccw(c1351.82,2613.18) 1389.42,2575.58 cw(c1351.82,2613.18) 1351.82,2560 ; 1351.82,2560 cw(c1351.82,2506.82) 1389.42,2544.42 ccw(c1351.82,2506.82) 1351.82,2560 ; 1358.18,2560 ccw(c1358.18,2506.82) 1320.58,2544.42 cw(c1358.18,2506.82) 1358.18,2560 ; 1358.18,2560 cw(c1358.18,2613.18) 1320.58,2575.58 ccw(c1358.18,2613.18) 1358.18,2560 ; 1451.82,2560 ccw(c1451.82,2613.18) 1489.42,2575.58 cw(c1451.82,2613.18) 1451.82,2560 ; 1451.82,2560 cw(c1451.82,2506.82) 1489.42,2544.42 ccw(c1451.82,2506.82) 1451.82,2560 ; 1458.18,2560 ccw(c1458.18,2506.82) 1420.58,2544.42 cw(c1458.18,2506.82) 1458.18,2560 ; 1458.18,2560 cw(c1458.18,2613.18) 1420.58,2575.58 ccw(c1458.18,2613.18) 1458.18,2560 ; 2495.72,1159.28 ccw(c2485,1148.56) 2485,1163.72 cw(c2485,1148.56) 2495.72,1159.28 ; 2495.72,1159.28 cw(c2506.44,1170) 2491.28,1170 ccw(c2506.44,1170) 2495.72,1159.28 ; 3592.28,932.28 ccw(c3549.55,975) 3609.97,975 cw(c3549.55,975) 3592.28,932.28 ; 3592.28,932.28 cw(c3635,889.55) 3635,949.97 ccw(c3635,889.55) 3592.28,932.28 ; 3704,925 ccw(c3643.02,864.02) 3636.8,950.04 cw(c3643.02,864.02) 3704,925 ; 4105.58,1105 ccw(c4105.58,1134.42) 4126.38,1113.62 cw(c4105.58,1134.42) 4105.58,1105 ; 4105.58,1105 cw(c4105.58,1075.58) 4126.38,1096.38 ccw(c4105.58,1075.58) 4105.58,1105 ; v1@3124.44,2905.56 cw(c3137.57,2892.43) 3137.57,2911 ccw(c3137.57,2892.43) v1@3124.44,2905.56 ; 3215.5,2883.5 ccw(c3245,2913) 3245,2871.28 cw(c3245,2913) 3215.5,2883.5 ; K2.1@3635.72,965 cw(c3639.89,907.3) 3680.79,948.21 ccw(c3639.89,907.3) K2.1@3635.72,965
  Bottom Layer w25: v3(2084,4185) 2124.57,4185 2124.57,4272 2160,4307.43 R11.1@2160,4394.57 2164.08,4390.49 2800.49,4390.49 P1.1@3065,4655 3320,4400 P11.4@3320,4215 P11.4@3320,4205 ; C23.1@2130.04,4189.67 ccw(c2103.26,4205.79) 2130.33,4221.42 ; 2160,4367.72 ccw(c2133.15,4367.72) 2152.14,4386.7 cw(c2133.15,4367.72) 2160,4367.72 ; 2160,4367.72 cw(c2186.85,4367.72) 2167.86,4386.7 ccw(c2186.85,4367.72) 2160,4367.72 ; P1.1@3035.93,4625.93 ccw(c3006.86,4655) 3047.97,4655 cw(c3006.86,4655) P1.1@3035.93,4625.93 ; P1.1@3035.93,4625.93 cw(c3065,4596.86) P1.1@3065,4637.97 ; P1.1@3035.93,4625.93 cw(c3065,4596.86) P1.1@3065,4637.97 ; P1.1@3065,4637.97 cw(c3065,4596.86) P1.1@3094.07,4625.93 ; P1.1@3065,4637.97 cw(c3065,4596.86) P1.1@3094.07,4625.93 ; P1.1@3094.07,4625.93 cw(c3123.14,4655) 3082.03,4655 ccw(c3123.14,4655) P1.1@3094.07,4625.93 ; 3320,4256.11 ccw(c3361.11,4256.11) 3332.04,4227.04 cw(c3361.11,4256.11) 3320,4256.11 ; 3320,4256.11 cw(c3278.89,4256.11) 3307.96,4227.04 ccw(c3278.89,4256.11) 3320,4256.11 ; 2110.15,4185 cw(c2110.15,4154.52) 2131.7,4176.07 ccw(c2110.15,4154.52) 2110.15,4185 ; 2115.28,4185 ccw(c2115.28,4208.22) 2131.7,4191.8 cw(c2115.28,4208.22) 2115.28,4185 ; 2124.57,4247 ccw(c2202.63,4247) 2147.43,4191.8 cw(c2202.63,4247) 2124.57,4247 ; R11.1@2171.8,4402.43 ccw(c2200.63,4431.26) 2200.63,4390.49 cw(c2200.63,4431.26) R11.1@2171.8,4402.43
  other v1: 2020,1890 3245,2865 3120,2910 4280,4275 4250,4310 4280,4345 4250,4380 4280,4410
VCC5V: C3.2 C22.2 C30.2 C31.2 F1.1 J3.4 P22.1 P22.2 P22.3 P22.4 U2.3 U7.3 U8.16 | length 15577.3
  Top Layer w10: U2.3@1420,4298.54 1420,4243.43 ; v1@1430.43,4233 1420,4243.43 ; v1@2793.8,1476.24 cw(c2807.87,1473.36) 2804.15,1487.23 ; v1(2795,1476) 2844,1525 C22.2@2914.57,1525 2914.57,1275.43 J3.4@2915,1275 ; v1@2795.24,1474.8 ccw(c2792.36,1488.87) 2806.23,1485.15 ; F1.1@4578.39,4015 4578.39,3899.39 ; 4718.29,3775.64 ccw(c4729.12,3793.1) C31.2@4745.88,3781.21 ; 4726.84,3780.58 ccw(c4735.44,3795.47) C31.2@4747.74,3783.45 ; 4727.32,3770.04 ccw(c4737.81,3786.93) C31.2@4754.03,3775.42 ; 4735.38,3775.65 cw(c4727.12,3761.34) C31.2@4743.08,3765.61 ; 4736.36,3764.43 ccw(c4746.5,3780.77) C31.2@4762.19,3769.64 ; C31.2@4760,3785.43 4670,3785.43 4660,3775.43 C30.2@4570,3775.43 4570,3891 4578.39,3899.39 ; 1420,4243.43 ccw(c1402.34,4243.43) 1414.14,4256.58 cw(c1402.34,4243.43) 1420,4243.43 ; 1420,4243.43 cw(c1437.66,4243.43) 1425.86,4256.58 ccw(c1437.66,4243.43) 1420,4243.43 ; 1420,4243.43 cw(c1411.3,4234.74) 1422.21,4229.05 ccw(c1411.3,4234.74) 1420,4243.43 ; 2809.99,1490.99 ccw(c2824.98,1476) 2803.78,1476 cw(c2824.98,1476) 2809.99,1490.99 ; 2809.99,1490.99 cw(c2795,1505.98) 2795,1484.78 ccw(c2795,1505.98) 2809.99,1490.99 ; 2869.61,1525 ccw(c2869.61,1569.96) 2901.4,1538.17 cw(c2869.61,1569.96) 2869.61,1525 ; 2869.61,1525 cw(c2869.61,1480.04) 2901.4,1511.83 ccw(c2869.61,1480.04) 2869.61,1525 ; 2914.57,1476.11 ccw(c2869.61,1476.11) 2901.4,1507.9 cw(c2869.61,1476.11) 2914.57,1476.11 ; 2914.57,1476.11 cw(c2959.53,1476.11) 2927.74,1507.9 ccw(c2959.53,1476.11) 2914.57,1476.11 ; 4570,3820.39 ccw(c4614.96,3820.39) 4583.17,3788.6 cw(c4614.96,3820.39) 4570,3820.39 ; 4570,3820.39 cw(c4525.04,3820.39) 4556.83,3788.6 ccw(c4525.04,3820.39) 4570,3820.39 ; 4578.39,3899.39 ccw(c4500.66,3899.39) 4550.2,3959.28 cw(c4500.66,3899.39) 4578.39,3899.39 ; 4578.39,3899.39 cw(c4656.11,3899.39) 4606.57,3959.28 ccw(c4656.11,3899.39) 4578.39,3899.39 ; 4578.39,3920.64 ccw(c4518.24,3920.64) 4556.58,3966.99 cw(c4518.24,3920.64) 4578.39,3920.64 ; 4578.39,3920.64 cw(c4638.53,3920.64) 4600.19,3966.99 ccw(c4638.53,3920.64) 4578.39,3920.64 ; 4578.39,3941.89 ccw(c4535.82,3941.89) 4562.95,3974.69 cw(c4535.82,3941.89) 4578.39,3941.89 ; 4578.39,3941.89 cw(c4620.95,3941.89) 4593.82,3974.69 ccw(c4620.95,3941.89) 4578.39,3941.89 ; 4618.89,3775.43 ccw(c4618.89,3730.48) 4587.1,3762.27 cw(c4618.89,3730.48) 4618.89,3775.43 ; 4618.89,3775.43 cw(c4618.89,3820.39) 4587.1,3788.6 ccw(c4618.89,3820.39) 4618.89,3775.43 ; J3.4@2893.79,1311.21 ccw(c2843.62,1361.38) 2914.57,1361.38 cw(c2843.62,1361.38) J3.4@2893.79,1311.21 ; J3.4@2900.86,1304.14 ccw(c2867.76,1337.24) 2914.57,1337.24 cw(c2867.76,1337.24) J3.4@2900.86,1304.14 ; 2914.57,1339.33 ccw(c2964.33,1339.33) 2929.14,1304.14 cw(c2964.33,1339.33) 2914.57,1339.33 ; 2914.57,1363.47 ccw(c2988.47,1363.47) 2936.21,1311.21 cw(c2988.47,1363.47) 2914.57,1363.47 ; 4679.89,3785.43 cw(c4679.89,3689.26) 4747.9,3757.27 ccw(c4679.89,3689.26) 4679.89,3785.43 ; 4704.03,3785.43 cw(c4704.03,3713.41) 4754.97,3764.34 ccw(c4704.03,3713.41) 4704.03,3785.43 ; 4728.18,3785.43 cw(c4728.18,3737.55) 4762.04,3771.41 ccw(c4728.18,3737.55) 4728.18,3785.43
  Top Layer w20: v1(1095,2004.96) v1(1095,4125)
  Top Layer w50: F1.1@4578.39,4015 4578.39,4151.61 4490,4240 4490,4405 4535.55,4450.55 U7.3@4597.87,4450.55 ; 4578.39,4095.11 ccw(c4636.84,4095.11) 4595.51,4053.77 cw(c4636.84,4095.11) 4578.39,4095.11 ; 4578.39,4095.11 cw(c4519.93,4095.11) 4561.27,4053.77 ccw(c4519.93,4095.11) 4578.39,4095.11 ; 4527.94,4202.06 cw(c4495.88,4170) 4541.22,4170 ccw(c4495.88,4170) 4527.94,4202.06 ; v1@4530,4181.22 cw(c4530,4135.88) 4562.06,4167.94 ccw(c4530,4135.88) v1@4530,4181.22
  Bottom Layer w10: v1(1095,2004.96) 1095,1960 1450,1605 1705,1605 1925,1385 2684,1385 2775,1476 ; v1(1095,2440) P22.4@1205,2440 P22.3@1305,2440 P22.2@1405,2440 P22.1@1505,2440 ; v1@1430.43,4233 C3.2@1430.43,4400 ; v1(2795,1476) 2775,1476 ; 3495,4060 3580,4060 3629,4109 3805,4109 U8.16@3805,4148.54 ; 1095,1983.77 ccw(c1073.8,1983.77) 1088.79,1998.75 cw(c1073.8,1983.77) 1095,1983.77 ; 1095,1983.77 cw(c1116.2,1983.77) 1101.21,1998.75 ccw(c1116.2,1983.77) 1095,1983.77 ; 1116.2,2440 ccw(c1116.2,2418.8) 1101.21,2433.79 cw(c1116.2,2418.8) 1116.2,2440 ; 1116.2,2440 cw(c1116.2,2461.2) 1101.21,2446.21 ccw(c1116.2,2461.2) 1116.2,2440 ; 1145.79,2440 ccw(c1145.79,2499.21) 1187.66,2457.34 cw(c1145.79,2499.21) 1145.79,2440 ; 1145.79,2440 cw(c1145.79,2380.79) 1187.66,2422.66 ccw(c1145.79,2380.79) 1145.79,2440 ; 1169.93,2440 ccw(c1169.93,2475.07) 1194.73,2450.27 cw(c1169.93,2475.07) 1169.93,2440 ; 1169.93,2440 cw(c1169.93,2404.93) 1194.73,2429.73 ccw(c1169.93,2404.93) 1169.93,2440 ; 1240.07,2440 ccw(c1240.07,2404.93) 1215.27,2429.73 cw(c1240.07,2404.93) 1240.07,2440 ; 1240.07,2440 cw(c1240.07,2475.07) 1215.27,2450.27 ccw(c1240.07,2475.07) 1240.07,2440 ; 1245.79,2440 ccw(c1245.79,2499.21) 1287.66,2457.34 cw(c1245.79,2499.21) 1245.79,2440 ; 1245.79,2440 cw(c1245.79,2380.79) 1287.66,2422.66 ccw(c1245.79,2380.79) 1245.79,2440 ; 1264.21,2440 ccw(c1264.21,2380.79) 1222.34,2422.66 cw(c1264.21,2380.79) 1264.21,2440 ; 1264.21,2440 cw(c1264.21,2499.21) 1222.34,2457.34 ccw(c1264.21,2499.21) 1264.21,2440 ; 1269.93,2440 ccw(c1269.93,2475.07) 1294.73,2450.27 cw(c1269.93,2475.07) 1269.93,2440 ; 1269.93,2440 cw(c1269.93,2404.93) 1294.73,2429.73 ccw(c1269.93,2404.93) 1269.93,2440 ; 1340.07,2440 ccw(c1340.07,2404.93) 1315.27,2429.73 cw(c1340.07,2404.93) 1340.07,2440 ; 1340.07,2440 cw(c1340.07,2475.07) 1315.27,2450.27 ccw(c1340.07,2475.07) 1340.07,2440 ; 1345.79,2440 ccw(c1345.79,2499.21) 1387.66,2457.34 cw(c1345.79,2499.21) 1345.79,2440 ; 1345.79,2440 cw(c1345.79,2380.79) 1387.66,2422.66 ccw(c1345.79,2380.79) 1345.79,2440 ; 1364.21,2440 ccw(c1364.21,2380.79) 1322.34,2422.66 cw(c1364.21,2380.79) 1364.21,2440 ; 1364.21,2440 cw(c1364.21,2499.21) 1322.34,2457.34 ccw(c1364.21,2499.21) 1364.21,2440 ; 1369.93,2440 ccw(c1369.93,2475.07) 1394.73,2450.27 cw(c1369.93,2475.07) 1369.93,2440 ; 1369.93,2440 cw(c1369.93,2404.93) 1394.73,2429.73 ccw(c1369.93,2404.93) 1369.93,2440 ; 1430.43,4351.11 ccw(c1385.48,4351.11) 1417.27,4382.9 cw(c1385.48,4351.11) 1430.43,4351.11 ; 1430.43,4351.11 cw(c1475.39,4351.11) 1443.6,4382.9 ccw(c1475.39,4351.11) 1430.43,4351.11 ; 1440.07,2440 ccw(c1440.07,2404.93) 1415.27,2429.73 cw(c1440.07,2404.93) 1440.07,2440 ; 1440.07,2440 cw(c1440.07,2475.07) 1415.27,2450.27 ccw(c1440.07,2475.07) 1440.07,2440 ; 1445.79,2440 ccw(c1445.79,2499.21) 1487.66,2457.34 cw(c1445.79,2499.21) 1445.79,2440 ; 1445.79,2440 cw(c1445.79,2380.79) 1487.66,2422.66 ccw(c1445.79,2380.79) 1445.79,2440 ; 1464.21,2440 ccw(c1464.21,2380.79) 1422.34,2422.66 cw(c1464.21,2380.79) 1464.21,2440 ; 1464.21,2440 cw(c1464.21,2499.21) 1422.34,2457.34 ccw(c1464.21,2499.21) 1464.21,2440 ; 1469.93,2440 ccw(c1469.93,2475.07) 1494.73,2450.27 cw(c1469.93,2475.07) 1469.93,2440 ; 1469.93,2440 cw(c1469.93,2404.93) 1494.73,2429.73 ccw(c1469.93,2404.93) 1469.93,2440 ; 2775,1476 ccw(c2775,1494.39) 2788.54,1481.94 cw(c2775,1494.39) 2775,1476 ; 2775,1476 cw(c2775,1457.61) 2788.54,1470.06 ccw(c2775,1457.61) 2775,1476 ; v1@1423.79,4231.21 ccw(c1407.76,4247.24) 1430.43,4247.24 cw(c1407.76,4247.24) v1@1423.79,4231.21 ; 1430.43,4245.15 ccw(c1450.15,4245.15) 1436.21,4231.21 cw(c1450.15,4245.15) 1430.43,4245.15 ; 3773.88,4109 ccw(c3773.88,4144.23) 3798.79,4119.32 cw(c3773.88,4144.23) 3773.88,4109
  Bottom Layer w20: v1(1095,4125) 1203,4233 1430.43,4233 1552,4233 1600,4185 1925,4185 2040,4070 2470,4070 2490,4090 2910,4090 2940,4060 3043.52,4060 3045.53,4062.01 3339.47,4062.01 3342.74,4058.74 3402.95,4058.74 3404.21,4060 3495,4060 3635,3920 4265,3920 4365,4020 4440,4020 4525,4105 v1@4525,4165 ; 1412.82,4230.7 ccw(c1423.37,4248.97) v1@1428.99,4228.64 ; v1@1431.01,4228.64 ccw(c1436.63,4248.97) 1447.18,4230.7 ; 1401.56,4233 cw(c1401.56,4196.56) 1427.33,4222.33 ccw(c1401.56,4196.56) 1401.56,4233 ; v1@1432.67,4222.33 cw(c1458.44,4196.56) 1458.44,4233 ccw(c1458.44,4196.56) v1@1432.67,4222.33 ; 4525,4148.8 cw(c4551.2,4148.8) 4532.67,4167.33 ccw(c4551.2,4148.8) 4525,4148.8
  other v1: 4530,4170 1430,4225
pads on no net: J2.5 J2.6 J2.7 J3. J3.2 J3.6 J4.5 J4.6 J4.7 J5.5 J5.6 J5.7 K2.3 K2.4 K3.3 K3.4 K4.3 K4.4 RST.3 RST.4 SD1.10 SD1.11 SD2.8 SD2.9 SD2.10 SD2.11 SD2.12 SD2.13 SD2.14 SD2.15 SD2.16 SD2.17 U2.5 U8.9 U8.10 U8.11 U8.12 U8.15 U9.2 U9.3 U9.4 U9.11 U9.12 U9.13 U9.14 U9.16 U9.17 U9.18 U9.19 U9.28 U9.29 U9.38 U9.39 U9.40

## Polygon pours and split planes (outlines as drawn)
VCC on Bottom Layer "Top Layer-No Net" (solid, remove dead copper, pour order 6): 4230,4490 4230,4220 4585,4220 4585,4495 4230,4495
GND on Bottom Layer "Top Layer-No Net" (solid, remove dead copper, pour order 10): 4834.9,4810 4840.88,4804.02 4860.3,4804.02 4875.98,4804.02 4945,4735 4950.4,4729.6 4950.4,4680 4950.4,990.4 4945,985 4940,980 4940,950 4880,890 4875,885 4825,885 1125,885 1112.7,897.3 1095.58,897.3 1082.7,897.3 1025,955 1020,960 1020,995 1020,4694.29 1026.11,4700.4 1034.8,4709.09 1034.8,4729.75 1105.15,4800.1 1115.05,4810 1185,4810 4836.67,4810 4837.65,4809.01
VCC on Top Layer "Top Layer-No Net" (solid, remove dead copper, pour order 5): 4410,4465 4405,4470 4405,4595 4240,4430 4055,4430 3915,4430 3905,4420 3905,4355 4015,4245 4010,4240 4010,4160 4248.39,4160 4293.39,4205 4415,4205 4415,4460
GND on Top Layer "Top Layer-No Net" (solid, remove dead copper, pour order 8): 1140,4810 1120.59,4810 1114.61,4804.02 1101.43,4790.84 1086.98,4790.84 1080.84,4790.84 1025,4735 1025,4690 1025,986.51 1028.38,983.14 1034.68,976.83 1034.68,963.74 1034.68,950.32 1100,885 1245,885 4840,885 4845.75,890.75 4863.75,890.75 4874.4,890.75 4936.72,953.08 4949.62,965.97 4949.62,1000.19 4949.62,4684.62 4950,4685 4945,4690 4945,4710 4945,4737.15 4896.65,4785.5 4872.15,4810 4825,4810 1140,4810

## Keep-outs
Keep-Out Layer:
  lines w10: 1025,998.68 1025,4695 ; 1025.63,998.68 ccw(c1154.78,1013.49) 1135,885 4825,885 ccw(c4825,1010) 4950,1010 4950,4665 ; 1025.76,4694.91 cw(c1154.9,4680) 1140.1,4809.15 ; 1140,4810 4834.9,4810 ; 4834.9,4809.14 cw(c4820,4680) 4949.14,4665.1

## Other copper
Top Layer:
  rectangle net VCC: 4217.6,4245 4375,4410
  rectangle net VCC: 4280,4395 4390.63,4446.38